# Altium PCB PCB2.PcbDoc (part 2 of 2)
Units mm, origin at the board's own origin, x right, y up, seen from the top; angles counter-clockwise.
Board outline 211.07 x 146.43 mm, 4 copper layers (Top Layer, Mid Layer 1, Mid Layer 2, Bottom Layer), stack 1.57 mm thick; 324 components, 350 nets, 1525 pads, 85 vias.
Unrouted connection lines stored in the file: 956.
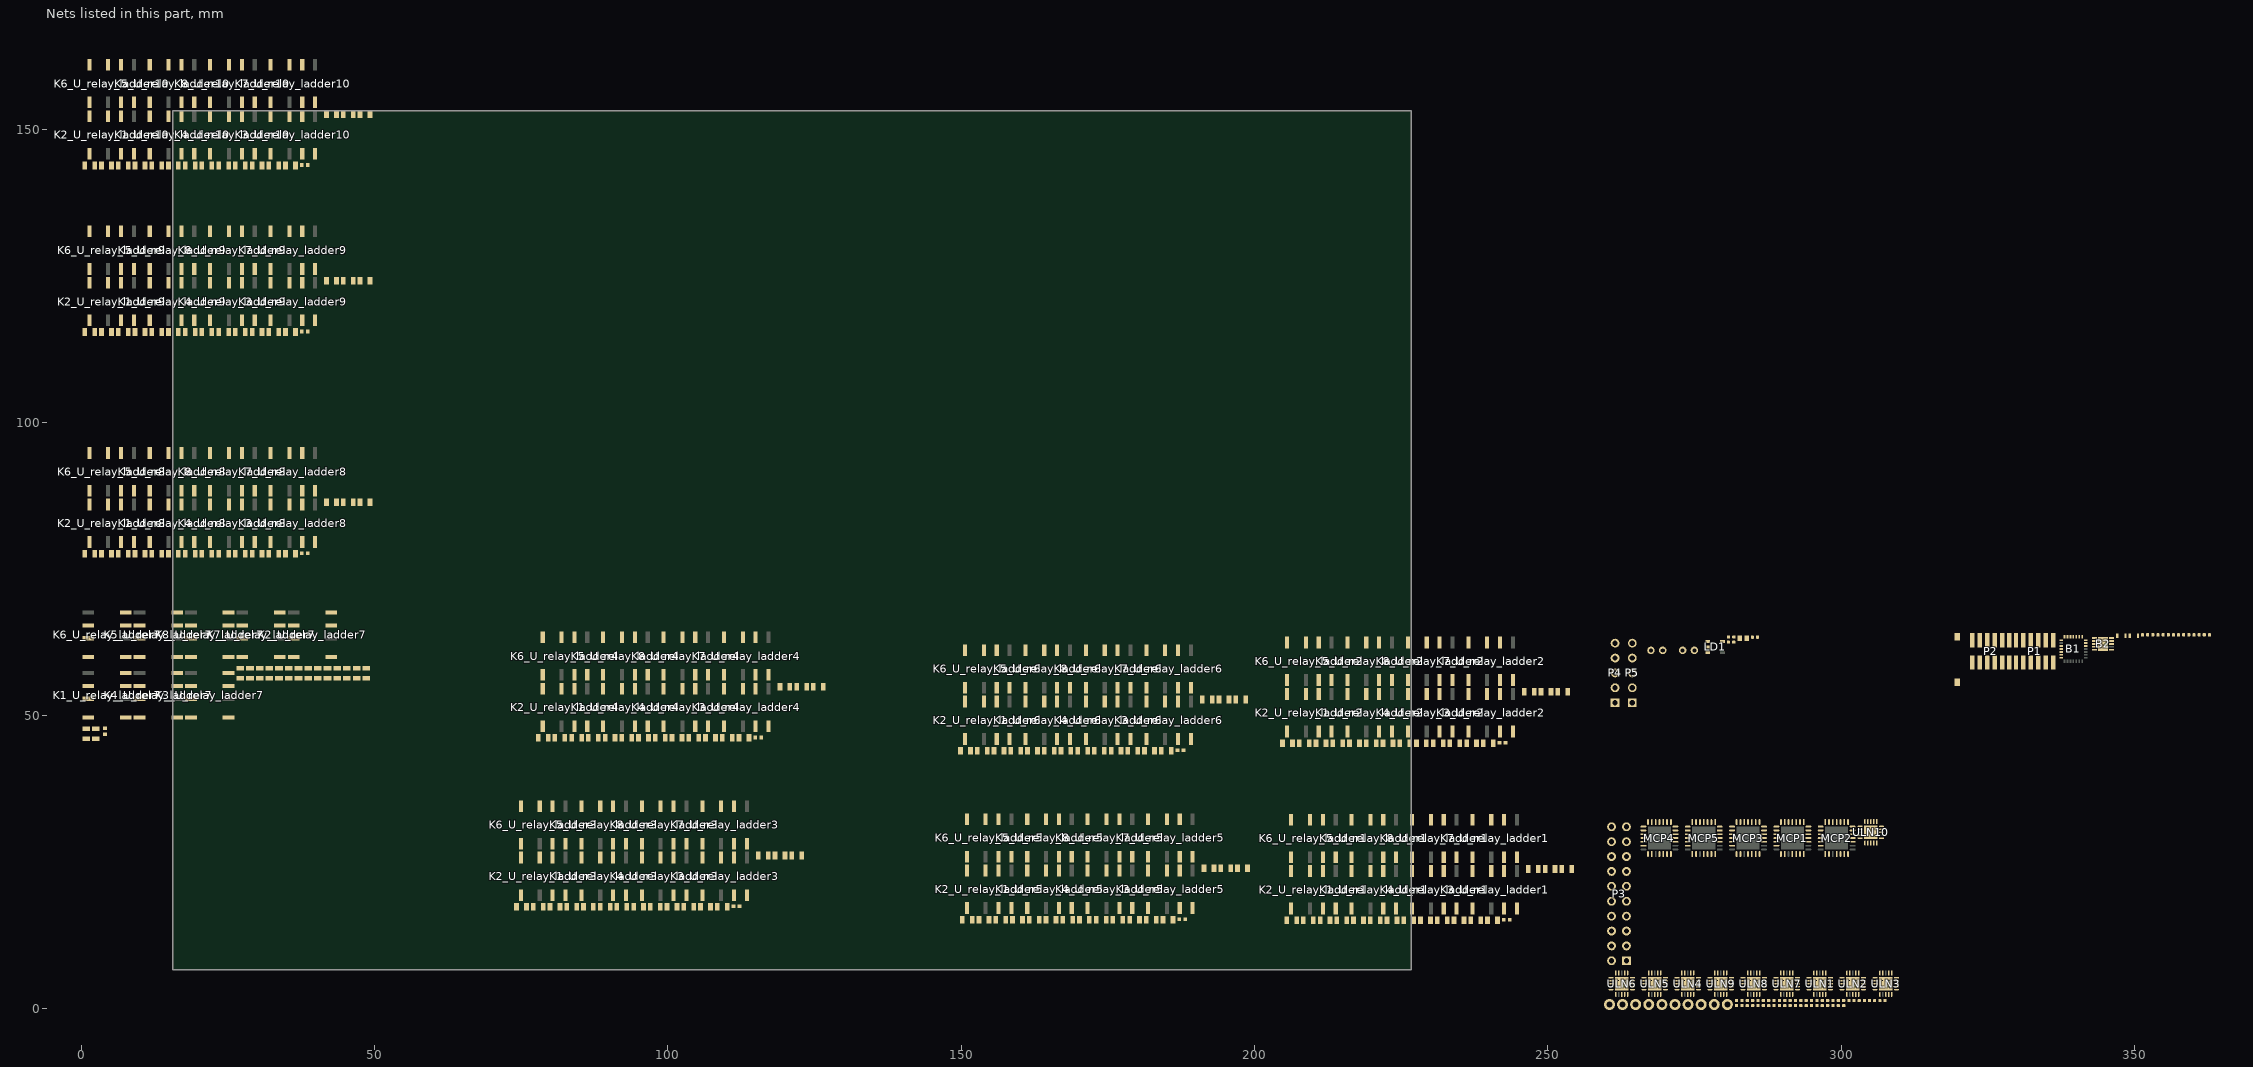
[diagram p2: the nets of this part, all layers, seen from the top]

## Part data
B1: "Mainstream Arm Cortex-M0+ MCU with 32 Kbytes of Flash memory, 12 Kbytes RAM, 48 MHz CPU, 2x USART, timers, ADC, comm. I/F, 2-3.6V", Manufacturer_Name=STMicroelectronics, Mouser Part Number=511-STM32C031G6U6, Datasheet Link=https://www.st.com/resource/en/datasheet/stm32c031c4.pdf, Geometry.Height=0.6mm, Manufacturer_Part_Number=STM32C031G6U6, Mouser Price/Stock=https://www.mouser.co.uk/ProductDetail/STMicroelectronics/STM32C031G6U6?qs=IPgv5n7u5QZqRf3nOTChhw%3D%3D
B2: "RS-422/RS-485 Interface IC Wide Supply Trans with I/O Interface", Manufacturer_Name="MaxLinear, Inc.", Mouser Part Number=701-XR33202EEHBTR-F, Datasheet Link=https://www.maxlinear.com/ds/xr33202.pdf, Geometry.Height=0.8mm, Manufacturer_Part_Number=XR33202EEHBTR-F, Mouser Price/Stock=https://www.mouser.co.uk/ProductDetail/MaxLinear/XR33202EEHBTR-F?qs=GtWAI9k6EVi4nRW8bj1LFw%3D%3D
C1 C2 C3 C4 C5 C6 C7 C8 C9 C10 C11 C12 C13 C14 C15 C16 C17 C18 C19 C22 C23 C24 C25 C26 C27 C28 C29: library part C, "Capacitor"
C20 C21: "Capacitor Polarized"
K1_U_relay_ladder1 K1_U_relay_ladder2 K1_U_relay_ladder3 K1_U_relay_ladder4 K1_U_relay_ladder5 K1_U_relay_ladder6 K1_U_relay_ladder7 K1_U_relay_ladder8 K1_U_relay_ladder9 K1_U_relay_ladder10 K2_U_relay_ladder1 K2_U_relay_ladder2 K2_U_relay_ladder3 K2_U_relay_ladder4 K2_U_relay_ladder5 K2_U_relay_ladder6 K2_U_relay_ladder7 K2_U_relay_ladder8 K2_U_relay_ladder9 K2_U_relay_ladder10 K3_U_relay_ladder1 K3_U_relay_ladder2 K3_U_relay_ladder3 K3_U_relay_ladder4 K3_U_relay_ladder5 K3_U_relay_ladder6 K3_U_relay_ladder7 K3_U_relay_ladder8 K3_U_relay_ladder9 K3_U_relay_ladder10 K4_U_relay_ladder1 K4_U_relay_ladder2 K4_U_relay_ladder3 K4_U_relay_ladder4 K4_U_relay_ladder5 K4_U_relay_ladder6 K4_U_relay_ladder7 K4_U_relay_ladder8 K4_U_relay_ladder9 K4_U_relay_ladder10 K5_U_relay_ladder1 K5_U_relay_ladder2 K5_U_relay_ladder3 K5_U_relay_ladder4 K5_U_relay_ladder5 K5_U_relay_ladder6 K5_U_relay_ladder7 K5_U_relay_ladder8 K5_U_relay_ladder9 K5_U_relay_ladder10 K6_U_relay_ladder1 K6_U_relay_ladder2 K6_U_relay_ladder3 K6_U_relay_ladder4 K6_U_relay_ladder5 K6_U_relay_ladder6 K6_U_relay_ladder7 K6_U_relay_ladder8 K6_U_relay_ladder9 K6_U_relay_ladder10 K7_U_relay_ladder1 K7_U_relay_ladder2 K7_U_relay_ladder3 K7_U_relay_ladder4 K7_U_relay_ladder5 K7_U_relay_ladder6 K7_U_relay_ladder7 K7_U_relay_ladder8 K7_U_relay_ladder9 K7_U_relay_ladder10 K8_U_relay_ladder1 K8_U_relay_ladder2 K8_U_relay_ladder3 K8_U_relay_ladder4 K8_U_relay_ladder5 K8_U_relay_ladder6 K8_U_relay_ladder7 K8_U_relay_ladder8 K8_U_relay_ladder9 K8_U_relay_ladder10: library part "IM-GR Relay DPDT", "TE CONNECTIVITY  IM-GR  RELAY, DPDT, NO", Farnell ID=1175070, URL=http://si.farnell.com/te-connectivity-axicom/im06gr/relay-gull-wing-dpco-12vdc-2a/dp/1175070
P1 P2: library part "Header 6X2", "Header, 6-Pin, Dual row", LatestRevisionDate=17-Jul-2002, LatestRevisionNote="Re-released for DXP Platform.", Publisher="Altium Limited"
P3: "Header, 10-Pin, Dual row", LatestRevisionDate=17-Jul-2002, LatestRevisionNote="Re-released for DXP Platform.", Publisher="Altium Limited"
P4 P5: "Header, 5-Pin", LatestRevisionDate=17-Jul-2002, LatestRevisionNote="Re-released for DXP Platform.", Publisher="Altium Limited"
R1 R2 R3 R4 R5_U_relay_ladder1 R5_U_relay_ladder2 R5_U_relay_ladder3 R5_U_relay_ladder4 R5_U_relay_ladder5 R5_U_relay_ladder6 R5_U_relay_ladder7 R5_U_relay_ladder8 R5_U_relay_ladder9 R5_U_relay_ladder10 R6_U_relay_ladder1 R6_U_relay_ladder2 R6_U_relay_ladder3 R6_U_relay_ladder4 R6_U_relay_ladder5 R6_U_relay_ladder6 R6_U_relay_ladder7 R6_U_relay_ladder8 R6_U_relay_ladder9 R6_U_relay_ladder10 R7_U_relay_ladder1 R7_U_relay_ladder2 R7_U_relay_ladder3 R7_U_relay_ladder4 R7_U_relay_ladder5 R7_U_relay_ladder6 R7_U_relay_ladder7 R7_U_relay_ladder8 R7_U_relay_ladder9 R7_U_relay_ladder10 R8_U_relay_ladder1 R8_U_relay_ladder2 R8_U_relay_ladder3 R8_U_relay_ladder4 R8_U_relay_ladder5 R8_U_relay_ladder6 R8_U_relay_ladder7 R8_U_relay_ladder8 R8_U_relay_ladder9 R8_U_relay_ladder10 R9_U_relay_ladder1 R9_U_relay_ladder2 R9_U_relay_ladder3 R9_U_relay_ladder4 R9_U_relay_ladder5 R9_U_relay_ladder6 R9_U_relay_ladder7 R9_U_relay_ladder8 R9_U_relay_ladder9 R9_U_relay_ladder10 R10_U_relay_ladder1 R10_U_relay_ladder2 R10_U_relay_ladder3 R10_U_relay_ladder4 R10_U_relay_ladder5 R10_U_relay_ladder6 R10_U_relay_ladder7 R10_U_relay_ladder8 R10_U_relay_ladder9 R10_U_relay_ladder10 R11_U_relay_ladder1 R11_U_relay_ladder2 R11_U_relay_ladder3 R11_U_relay_ladder4 R11_U_relay_ladder5 R11_U_relay_ladder6 R11_U_relay_ladder7 R11_U_relay_ladder8 R11_U_relay_ladder9 R11_U_relay_ladder10 R12_U_relay_ladder1 R12_U_relay_ladder2 R12_U_relay_ladder3 R12_U_relay_ladder4 R12_U_relay_ladder5 R12_U_relay_ladder6 R12_U_relay_ladder7 R12_U_relay_ladder8 R12_U_relay_ladder9 R12_U_relay_ladder10 R13_U_relay_ladder1 R13_U_relay_ladder2 R13_U_relay_ladder3 R13_U_relay_ladder4 R13_U_relay_ladder5 R13_U_relay_ladder6 R13_U_relay_ladder7 R13_U_relay_ladder8 R13_U_relay_ladder9 R13_U_relay_ladder10 R14_U_relay_ladder1 R14_U_relay_ladder2 R14_U_relay_ladder3 R14_U_relay_ladder4 R14_U_relay_ladder5 R14_U_relay_ladder6 R14_U_relay_ladder7 R14_U_relay_ladder8 R14_U_relay_ladder9 R14_U_relay_ladder10 R15_U_relay_ladder1 R15_U_relay_ladder2 R15_U_relay_ladder3 R15_U_relay_ladder4 R15_U_relay_ladder5 R15_U_relay_ladder6 R15_U_relay_ladder7 R15_U_relay_ladder8 R15_U_relay_ladder9 R15_U_relay_ladder10 R16_U_relay_ladder1 R16_U_relay_ladder2 R16_U_relay_ladder3 R16_U_relay_ladder4 R16_U_relay_ladder5 R16_U_relay_ladder6 R16_U_relay_ladder7 R16_U_relay_ladder8 R16_U_relay_ladder9 R16_U_relay_ladder10 R17_U_relay_ladder1 R17_U_relay_ladder2 R17_U_relay_ladder3 R17_U_relay_ladder4 R17_U_relay_ladder5 R17_U_relay_ladder6 R17_U_relay_ladder7 R17_U_relay_ladder8 R17_U_relay_ladder9 R17_U_relay_ladder10 R18_U_relay_ladder1 R18_U_relay_ladder2 R18_U_relay_ladder3 R18_U_relay_ladder4 R18_U_relay_ladder5 R18_U_relay_ladder6 R18_U_relay_ladder7 R18_U_relay_ladder8 R18_U_relay_ladder9 R18_U_relay_ladder10 R19_U_relay_ladder1 R19_U_relay_ladder2 R19_U_relay_ladder3 R19_U_relay_ladder4 R19_U_relay_ladder5 R19_U_relay_ladder6 R19_U_relay_ladder7 R19_U_relay_ladder8 R19_U_relay_ladder9 R19_U_relay_ladder10 R20_U_relay_ladder1 R20_U_relay_ladder2 R20_U_relay_ladder3 R20_U_relay_ladder4 R20_U_relay_ladder5 R20_U_relay_ladder6 R20_U_relay_ladder7 R20_U_relay_ladder8 R20_U_relay_ladder9 R20_U_relay_ladder10 R21 R22 R23 R24 R25: library part R, "R"
X1: "Tactile Switches Tact 50mA 12VDC, 6.0x3.5, 2.5mm H, 180gf, G leads, No ground pin, White Actuator", Manufacturer_Name="C & K COMPONENTS", Manufacturer_Part_Number="PTS636 SM25 SMTR LFS", Mouser Part Number=611-PTS636SM25SMTRLF, Datasheet Link="https://componentsearchengine.com/Datasheets/1/PTS636 SM25 SMTR LFS.pdf", Geometry.Height=2.7mm, Mouser Price/Stock=https://www.mouser.co.uk/ProductDetail/CK/PTS636-SM25-SMTR-LFS?qs=vLWxofP3U2yIXR4iooxesw%3D%3D

## Via types
v1: diameter 0.5, hole 0.2, Top Layer to Bottom Layer, 85 vias

## Nets (pads, with @x,y where several pads share a name; then routed paths per layer and width w, separated by ;. In a path a pad name is that pad's centre, name@x,y a point inside that pad or via, vN(x,y) a via of type N, cw(c..) or ccw(c..) an arc to the next point about the centre after c; other vN are vias at no path point)
+3V3: B1.3 B2.1 C1.1 C3.1 C7.2 C10.1 C11.1 C12.2 C13.2 C24.2 C25.2 LD1.5 MCP1.5 MCP2.5 MCP3.5 MCP4.5 MCP5.5 R1.1 R2.1 R4.1 R21.1 R22.1 R23.1 R24.1 R25.1
+12: C14.1 C15.1 C16.1 C17.1 C18.1 C19.1 C20.1 C26.1 C27.1 C28.1 C29.1 K1_U_relay_ladder1.1 K1_U_relay_ladder2.1 K1_U_relay_ladder3.1 K1_U_relay_ladder4.1 K1_U_relay_ladder5.1 K1_U_relay_ladder6.1 K1_U_relay_ladder7.1 K1_U_relay_ladder8.1 K1_U_relay_ladder9.1 K1_U_relay_ladder10.1 K2_U_relay_ladder1.1 K2_U_relay_ladder2.1 K2_U_relay_ladder3.1 K2_U_relay_ladder4.1 K2_U_relay_ladder5.1 K2_U_relay_ladder6.1 K2_U_relay_ladder7.1 K2_U_relay_ladder8.1 K2_U_relay_ladder9.1 K2_U_relay_ladder10.1 K3_U_relay_ladder1.1 K3_U_relay_ladder2.1 K3_U_relay_ladder3.1 K3_U_relay_ladder4.1 K3_U_relay_ladder5.1 K3_U_relay_ladder6.1 K3_U_relay_ladder7.1 K3_U_relay_ladder8.1 K3_U_relay_ladder9.1 K3_U_relay_ladder10.1 K4_U_relay_ladder1.1 K4_U_relay_ladder2.1 K4_U_relay_ladder3.1 K4_U_relay_ladder4.1 K4_U_relay_ladder5.1 K4_U_relay_ladder6.1 K4_U_relay_ladder7.1 K4_U_relay_ladder8.1 K4_U_relay_ladder9.1 K4_U_relay_ladder10.1 K5_U_relay_ladder1.1 K5_U_relay_ladder2.1 K5_U_relay_ladder3.1 K5_U_relay_ladder4.1 K5_U_relay_ladder5.1 K5_U_relay_ladder6.1 K5_U_relay_ladder7.1 K5_U_relay_ladder8.1 K5_U_relay_ladder9.1 K5_U_relay_ladder10.1 K6_U_relay_ladder1.1 K6_U_relay_ladder2.1 K6_U_relay_ladder3.1 K6_U_relay_ladder4.1 K6_U_relay_ladder5.1 K6_U_relay_ladder6.1 K6_U_relay_ladder7.1 K6_U_relay_ladder8.1 K6_U_relay_ladder9.1 K6_U_relay_ladder10.1 K7_U_relay_ladder1.1 K7_U_relay_ladder2.1 K7_U_relay_ladder3.1 K7_U_relay_ladder4.1 K7_U_relay_ladder5.1 K7_U_relay_ladder6.1 K7_U_relay_ladder7.1 K7_U_relay_ladder8.1 K7_U_relay_ladder9.1 K7_U_relay_ladder10.1 K8_U_relay_ladder1.1 K8_U_relay_ladder2.1 K8_U_relay_ladder3.1 K8_U_relay_ladder4.1 K8_U_relay_ladder5.1 K8_U_relay_ladder6.1 K8_U_relay_ladder7.1 K8_U_relay_ladder8.1 K8_U_relay_ladder9.1 K8_U_relay_ladder10.1 P4.2 P4.4 P5.2 P5.4 ULN1.9 ULN2.9 ULN3.9 ULN4.9 ULN5.9 ULN6.9 ULN7.9 ULN8.9 ULN9.9 ULN10.9
A1: K1_U_relay_ladder10.6 P3.3 R13_U_relay_ladder10.1
A2: K1_U_relay_ladder9.6 P3.7 R13_U_relay_ladder9.1
A3: K1_U_relay_ladder8.6 P3.11 R13_U_relay_ladder8.1
A4: K1_U_relay_ladder7.6 P3.15 R13_U_relay_ladder7.1
A5: K1_U_relay_ladder2.6 K1_U_relay_ladder6.6 P3.19 R13_U_relay_ladder2.1 R13_U_relay_ladder6.1
A6: K1_U_relay_ladder1.6 K1_U_relay_ladder3.6 K1_U_relay_ladder5.6 R13_U_relay_ladder1.1 R13_U_relay_ladder3.1 R13_U_relay_ladder5.1
A7: K1_U_relay_ladder4.6 R13_U_relay_ladder4.1
A_N: B2.8 P1.6 P2.6 R3.2
AGND: P3.4 P3.8 P3.12 P3.16 P3.20
B1: J3_U_relay_ladder10.1 J3_U_relay_ladder10.2 K8_U_relay_ladder10.3 K8_U_relay_ladder10.7 P3.2 R12_U_relay_ladder10.2 R20_U_relay_ladder10.2 TP1.1
B2: J3_U_relay_ladder9.1 J3_U_relay_ladder9.2 K8_U_relay_ladder9.3 K8_U_relay_ladder9.7 P3.6 R12_U_relay_ladder9.2 R20_U_relay_ladder9.2 TP2.1
B3: J3_U_relay_ladder8.1 J3_U_relay_ladder8.2 K8_U_relay_ladder8.3 K8_U_relay_ladder8.7 P3.10 R12_U_relay_ladder8.2 R20_U_relay_ladder8.2 TP3.1
B4: J3_U_relay_ladder7.1 J3_U_relay_ladder7.2 K8_U_relay_ladder7.3 K8_U_relay_ladder7.7 P3.14 R12_U_relay_ladder7.2 R20_U_relay_ladder7.2 TP4.1
B5: J3_U_relay_ladder2.1 J3_U_relay_ladder2.2 J3_U_relay_ladder6.1 J3_U_relay_ladder6.2 K8_U_relay_ladder2.3 K8_U_relay_ladder2.7 K8_U_relay_ladder6.3 K8_U_relay_ladder6.7 P3.18 R12_U_relay_ladder2.2 R12_U_relay_ladder6.2 R20_U_relay_ladder2.2 R20_U_relay_ladder6.2 TP5.1 TP9.1
B6: J3_U_relay_ladder1.1 J3_U_relay_ladder1.2 J3_U_relay_ladder3.1 J3_U_relay_ladder3.2 J3_U_relay_ladder5.1 J3_U_relay_ladder5.2 K8_U_relay_ladder1.3 K8_U_relay_ladder1.7 K8_U_relay_ladder3.3 K8_U_relay_ladder3.7 K8_U_relay_ladder5.3 K8_U_relay_ladder5.7 R12_U_relay_ladder1.2 R12_U_relay_ladder3.2 R12_U_relay_ladder5.2 R20_U_relay_ladder1.2 R20_U_relay_ladder3.2 R20_U_relay_ladder5.2 TP6.1 TP8.1 TP10.1
B7: J3_U_relay_ladder4.1 J3_U_relay_ladder4.2 K8_U_relay_ladder4.3 K8_U_relay_ladder4.7 R12_U_relay_ladder4.2 R20_U_relay_ladder4.2 TP7.1
B_P: B2.9 J2.1 P1.7 P2.7
BTN: B1.7 X1.2
C1: K1_U_relay_ladder10.4 P3.1 R5_U_relay_ladder10.1
C2: K1_U_relay_ladder9.4 P3.5 R5_U_relay_ladder9.1
C3: K1_U_relay_ladder8.4 P3.9 R5_U_relay_ladder8.1
C4: K1_U_relay_ladder7.4 P3.13 R5_U_relay_ladder7.1
C5: K1_U_relay_ladder2.4 K1_U_relay_ladder6.4 P3.17 R5_U_relay_ladder2.1 R5_U_relay_ladder6.1
C6: K1_U_relay_ladder1.4 K1_U_relay_ladder3.4 K1_U_relay_ladder5.4 R5_U_relay_ladder1.1 R5_U_relay_ladder3.1 R5_U_relay_ladder5.1
C7: K1_U_relay_ladder4.4 R5_U_relay_ladder4.1
GND: B1.4 B2.6 B2.11 C1.2 C2.2 C3.2 C4.1 C5.1 C6.1 C7.1 C8.2 C9.2 C10.2 C11.2 C12.1 C13.1 C20.2 C21.2 C22.1 C23.1 C24.1 C25.1 LD1.2 MCP1.6 MCP1.11 MCP1.12 MCP1.13 MCP2.6 MCP2.11 MCP2.12 MCP2.13 MCP3.6 MCP3.11 MCP3.12 MCP3.13 MCP4.6 MCP4.11 MCP4.12 MCP4.13 MCP5.6 MCP5.11 MCP5.12 MCP5.13 P1.5 P1.8 P2.5 P2.8 P4.1 P4.5 P5.1 P5.5 X1.1
INT: B1.6 P1.10 P2.10
MISO: J1.1 P1.1 P2.1
MISO_MCU: B1.24 J1.2 P2.2
MOSI_MCU: B1.25 P1.2
NetC4_2: C4.2 MCP1.14 R21.2
NetC5_2: C5.2 MCP2.14 R22.2
NetC6_2: C6.2 MCP3.14 R23.2
NetC22_2: C22.2 MCP4.14 R24.2
NetC23_2: C23.2 MCP5.14 R25.2
NetJ2_2: J2.2 R3.1
NetK1_U_relay_ladder1_3: K1_U_relay_ladder1.3 K2_U_relay_ladder1.4 R5_U_relay_ladder1.2 R6_U_relay_ladder1.1
NetK1_U_relay_ladder1_7: K1_U_relay_ladder1.7 K2_U_relay_ladder1.6 R13_U_relay_ladder1.2 R14_U_relay_ladder1.1
NetK1_U_relay_ladder1_8: K1_U_relay_ladder1.8 ULN10.10
NetK1_U_relay_ladder2_3: K1_U_relay_ladder2.3 K2_U_relay_ladder2.4 R5_U_relay_ladder2.2 R6_U_relay_ladder2.1
NetK1_U_relay_ladder2_7: K1_U_relay_ladder2.7 K2_U_relay_ladder2.6 R13_U_relay_ladder2.2 R14_U_relay_ladder2.1
NetK1_U_relay_ladder2_8: K1_U_relay_ladder2.8 ULN9.10
NetK1_U_relay_ladder3_3: K1_U_relay_ladder3.3 K2_U_relay_ladder3.4 R5_U_relay_ladder3.2 R6_U_relay_ladder3.1
NetK1_U_relay_ladder3_7: K1_U_relay_ladder3.7 K2_U_relay_ladder3.6 R13_U_relay_ladder3.2 R14_U_relay_ladder3.1
NetK1_U_relay_ladder3_8: K1_U_relay_ladder3.8 ULN8.10
NetK1_U_relay_ladder4_3: K1_U_relay_ladder4.3 K2_U_relay_ladder4.4 R5_U_relay_ladder4.2 R6_U_relay_ladder4.1
NetK1_U_relay_ladder4_7: K1_U_relay_ladder4.7 K2_U_relay_ladder4.6 R13_U_relay_ladder4.2 R14_U_relay_ladder4.1
NetK1_U_relay_ladder4_8: K1_U_relay_ladder4.8 ULN7.10
NetK1_U_relay_ladder5_3: K1_U_relay_ladder5.3 K2_U_relay_ladder5.4 R5_U_relay_ladder5.2 R6_U_relay_ladder5.1
NetK1_U_relay_ladder5_7: K1_U_relay_ladder5.7 K2_U_relay_ladder5.6 R13_U_relay_ladder5.2 R14_U_relay_ladder5.1
NetK1_U_relay_ladder5_8: K1_U_relay_ladder5.8 ULN6.10
NetK1_U_relay_ladder6_3: K1_U_relay_ladder6.3 K2_U_relay_ladder6.4 R5_U_relay_ladder6.2 R6_U_relay_ladder6.1
NetK1_U_relay_ladder6_7: K1_U_relay_ladder6.7 K2_U_relay_ladder6.6 R13_U_relay_ladder6.2 R14_U_relay_ladder6.1
NetK1_U_relay_ladder6_8: K1_U_relay_ladder6.8 ULN5.10
NetK1_U_relay_ladder7_3: K1_U_relay_ladder7.3 K2_U_relay_ladder7.4 R5_U_relay_ladder7.2 R6_U_relay_ladder7.1
NetK1_U_relay_ladder7_7: K1_U_relay_ladder7.7 K2_U_relay_ladder7.6 R13_U_relay_ladder7.2 R14_U_relay_ladder7.1
NetK1_U_relay_ladder7_8: K1_U_relay_ladder7.8 ULN4.10
NetK1_U_relay_ladder8_3: K1_U_relay_ladder8.3 K2_U_relay_ladder8.4 R5_U_relay_ladder8.2 R6_U_relay_ladder8.1
NetK1_U_relay_ladder8_7: K1_U_relay_ladder8.7 K2_U_relay_ladder8.6 R13_U_relay_ladder8.2 R14_U_relay_ladder8.1
NetK1_U_relay_ladder8_8: K1_U_relay_ladder8.8 ULN3.10
NetK1_U_relay_ladder9_3: K1_U_relay_ladder9.3 K2_U_relay_ladder9.4 R5_U_relay_ladder9.2 R6_U_relay_ladder9.1
NetK1_U_relay_ladder9_7: K1_U_relay_ladder9.7 K2_U_relay_ladder9.6 R13_U_relay_ladder9.2 R14_U_relay_ladder9.1
NetK1_U_relay_ladder9_8: K1_U_relay_ladder9.8 ULN2.10
NetK1_U_relay_ladder10_3: K1_U_relay_ladder10.3 K2_U_relay_ladder10.4 R5_U_relay_ladder10.2 R6_U_relay_ladder10.1
NetK1_U_relay_ladder10_7: K1_U_relay_ladder10.7 K2_U_relay_ladder10.6 R13_U_relay_ladder10.2 R14_U_relay_ladder10.1
NetK1_U_relay_ladder10_8: K1_U_relay_ladder10.8 ULN1.10
NetK2_U_relay_ladder1_3: K2_U_relay_ladder1.3 K3_U_relay_ladder1.4 R6_U_relay_ladder1.2 R7_U_relay_ladder1.1
NetK2_U_relay_ladder1_7: K2_U_relay_ladder1.7 K3_U_relay_ladder1.6 R14_U_relay_ladder1.2 R15_U_relay_ladder1.1
NetK2_U_relay_ladder1_8: K2_U_relay_ladder1.8 ULN10.11
NetK2_U_relay_ladder2_3: K2_U_relay_ladder2.3 K3_U_relay_ladder2.4 R6_U_relay_ladder2.2 R7_U_relay_ladder2.1
NetK2_U_relay_ladder2_7: K2_U_relay_ladder2.7 K3_U_relay_ladder2.6 R14_U_relay_ladder2.2 R15_U_relay_ladder2.1
NetK2_U_relay_ladder2_8: K2_U_relay_ladder2.8 ULN9.11
NetK2_U_relay_ladder3_3: K2_U_relay_ladder3.3 K3_U_relay_ladder3.4 R6_U_relay_ladder3.2 R7_U_relay_ladder3.1
NetK2_U_relay_ladder3_7: K2_U_relay_ladder3.7 K3_U_relay_ladder3.6 R14_U_relay_ladder3.2 R15_U_relay_ladder3.1
NetK2_U_relay_ladder3_8: K2_U_relay_ladder3.8 ULN8.11
NetK2_U_relay_ladder4_3: K2_U_relay_ladder4.3 K3_U_relay_ladder4.4 R6_U_relay_ladder4.2 R7_U_relay_ladder4.1
NetK2_U_relay_ladder4_7: K2_U_relay_ladder4.7 K3_U_relay_ladder4.6 R14_U_relay_ladder4.2 R15_U_relay_ladder4.1
NetK2_U_relay_ladder4_8: K2_U_relay_ladder4.8 ULN7.11
NetK2_U_relay_ladder5_3: K2_U_relay_ladder5.3 K3_U_relay_ladder5.4 R6_U_relay_ladder5.2 R7_U_relay_ladder5.1
NetK2_U_relay_ladder5_7: K2_U_relay_ladder5.7 K3_U_relay_ladder5.6 R14_U_relay_ladder5.2 R15_U_relay_ladder5.1
NetK2_U_relay_ladder5_8: K2_U_relay_ladder5.8 ULN6.11
NetK2_U_relay_ladder6_3: K2_U_relay_ladder6.3 K3_U_relay_ladder6.4 R6_U_relay_ladder6.2 R7_U_relay_ladder6.1
NetK2_U_relay_ladder6_7: K2_U_relay_ladder6.7 K3_U_relay_ladder6.6 R14_U_relay_ladder6.2 R15_U_relay_ladder6.1
NetK2_U_relay_ladder6_8: K2_U_relay_ladder6.8 ULN5.11
NetK2_U_relay_ladder7_3: K2_U_relay_ladder7.3 K3_U_relay_ladder7.4 R6_U_relay_ladder7.2 R7_U_relay_ladder7.1
NetK2_U_relay_ladder7_7: K2_U_relay_ladder7.7 K3_U_relay_ladder7.6 R14_U_relay_ladder7.2 R15_U_relay_ladder7.1
NetK2_U_relay_ladder7_8: K2_U_relay_ladder7.8 ULN4.11
NetK2_U_relay_ladder8_3: K2_U_relay_ladder8.3 K3_U_relay_ladder8.4 R6_U_relay_ladder8.2 R7_U_relay_ladder8.1
NetK2_U_relay_ladder8_7: K2_U_relay_ladder8.7 K3_U_relay_ladder8.6 R14_U_relay_ladder8.2 R15_U_relay_ladder8.1
NetK2_U_relay_ladder8_8: K2_U_relay_ladder8.8 ULN3.11
NetK2_U_relay_ladder9_3: K2_U_relay_ladder9.3 K3_U_relay_ladder9.4 R6_U_relay_ladder9.2 R7_U_relay_ladder9.1
NetK2_U_relay_ladder9_7: K2_U_relay_ladder9.7 K3_U_relay_ladder9.6 R14_U_relay_ladder9.2 R15_U_relay_ladder9.1
NetK2_U_relay_ladder9_8: K2_U_relay_ladder9.8 ULN2.11
NetK2_U_relay_ladder10_3: K2_U_relay_ladder10.3 K3_U_relay_ladder10.4 R6_U_relay_ladder10.2 R7_U_relay_ladder10.1
NetK2_U_relay_ladder10_7: K2_U_relay_ladder10.7 K3_U_relay_ladder10.6 R14_U_relay_ladder10.2 R15_U_relay_ladder10.1
NetK2_U_relay_ladder10_8: K2_U_relay_ladder10.8 ULN1.11
NetK3_U_relay_ladder1_3: K3_U_relay_ladder1.3 K4_U_relay_ladder1.4 R7_U_relay_ladder1.2 R8_U_relay_ladder1.1
NetK3_U_relay_ladder1_7: K3_U_relay_ladder1.7 K4_U_relay_ladder1.6 R15_U_relay_ladder1.2 R16_U_relay_ladder1.1
NetK3_U_relay_ladder1_8: K3_U_relay_ladder1.8 ULN10.12
NetK3_U_relay_ladder2_3: K3_U_relay_ladder2.3 K4_U_relay_ladder2.4 R7_U_relay_ladder2.2 R8_U_relay_ladder2.1
NetK3_U_relay_ladder2_7: K3_U_relay_ladder2.7 K4_U_relay_ladder2.6 R15_U_relay_ladder2.2 R16_U_relay_ladder2.1
NetK3_U_relay_ladder2_8: K3_U_relay_ladder2.8 ULN9.12
NetK3_U_relay_ladder3_3: K3_U_relay_ladder3.3 K4_U_relay_ladder3.4 R7_U_relay_ladder3.2 R8_U_relay_ladder3.1
NetK3_U_relay_ladder3_7: K3_U_relay_ladder3.7 K4_U_relay_ladder3.6 R15_U_relay_ladder3.2 R16_U_relay_ladder3.1
NetK3_U_relay_ladder3_8: K3_U_relay_ladder3.8 ULN8.12
NetK3_U_relay_ladder4_3: K3_U_relay_ladder4.3 K4_U_relay_ladder4.4 R7_U_relay_ladder4.2 R8_U_relay_ladder4.1
NetK3_U_relay_ladder4_7: K3_U_relay_ladder4.7 K4_U_relay_ladder4.6 R15_U_relay_ladder4.2 R16_U_relay_ladder4.1
NetK3_U_relay_ladder4_8: K3_U_relay_ladder4.8 ULN7.12
NetK3_U_relay_ladder5_3: K3_U_relay_ladder5.3 K4_U_relay_ladder5.4 R7_U_relay_ladder5.2 R8_U_relay_ladder5.1
NetK3_U_relay_ladder5_7: K3_U_relay_ladder5.7 K4_U_relay_ladder5.6 R15_U_relay_ladder5.2 R16_U_relay_ladder5.1
NetK3_U_relay_ladder5_8: K3_U_relay_ladder5.8 ULN6.12
NetK3_U_relay_ladder6_3: K3_U_relay_ladder6.3 K4_U_relay_ladder6.4 R7_U_relay_ladder6.2 R8_U_relay_ladder6.1
NetK3_U_relay_ladder6_7: K3_U_relay_ladder6.7 K4_U_relay_ladder6.6 R15_U_relay_ladder6.2 R16_U_relay_ladder6.1
NetK3_U_relay_ladder6_8: K3_U_relay_ladder6.8 ULN5.12
NetK3_U_relay_ladder7_3: K3_U_relay_ladder7.3 K4_U_relay_ladder7.4 R7_U_relay_ladder7.2 R8_U_relay_ladder7.1
NetK3_U_relay_ladder7_7: K3_U_relay_ladder7.7 K4_U_relay_ladder7.6 R15_U_relay_ladder7.2 R16_U_relay_ladder7.1
NetK3_U_relay_ladder7_8: K3_U_relay_ladder7.8 ULN4.12
NetK3_U_relay_ladder8_3: K3_U_relay_ladder8.3 K4_U_relay_ladder8.4 R7_U_relay_ladder8.2 R8_U_relay_ladder8.1
NetK3_U_relay_ladder8_7: K3_U_relay_ladder8.7 K4_U_relay_ladder8.6 R15_U_relay_ladder8.2 R16_U_relay_ladder8.1
NetK3_U_relay_ladder8_8: K3_U_relay_ladder8.8 ULN3.12
NetK3_U_relay_ladder9_3: K3_U_relay_ladder9.3 K4_U_relay_ladder9.4 R7_U_relay_ladder9.2 R8_U_relay_ladder9.1
NetK3_U_relay_ladder9_7: K3_U_relay_ladder9.7 K4_U_relay_ladder9.6 R15_U_relay_ladder9.2 R16_U_relay_ladder9.1
NetK3_U_relay_ladder9_8: K3_U_relay_ladder9.8 ULN2.12
NetK3_U_relay_ladder10_3: K3_U_relay_ladder10.3 K4_U_relay_ladder10.4 R7_U_relay_ladder10.2 R8_U_relay_ladder10.1
NetK3_U_relay_ladder10_7: K3_U_relay_ladder10.7 K4_U_relay_ladder10.6 R15_U_relay_ladder10.2 R16_U_relay_ladder10.1
NetK3_U_relay_ladder10_8: K3_U_relay_ladder10.8 ULN1.12
NetK4_U_relay_ladder1_3: K4_U_relay_ladder1.3 K5_U_relay_ladder1.4 R8_U_relay_ladder1.2 R9_U_relay_ladder1.1
NetK4_U_relay_ladder1_7: K4_U_relay_ladder1.7 K5_U_relay_ladder1.6 R16_U_relay_ladder1.2 R17_U_relay_ladder1.1
NetK4_U_relay_ladder1_8: K4_U_relay_ladder1.8 ULN10.13
NetK4_U_relay_ladder2_3: K4_U_relay_ladder2.3 K5_U_relay_ladder2.4 R8_U_relay_ladder2.2 R9_U_relay_ladder2.1
NetK4_U_relay_ladder2_7: K4_U_relay_ladder2.7 K5_U_relay_ladder2.6 R16_U_relay_ladder2.2 R17_U_relay_ladder2.1
NetK4_U_relay_ladder2_8: K4_U_relay_ladder2.8 ULN9.13
NetK4_U_relay_ladder3_3: K4_U_relay_ladder3.3 K5_U_relay_ladder3.4 R8_U_relay_ladder3.2 R9_U_relay_ladder3.1
NetK4_U_relay_ladder3_7: K4_U_relay_ladder3.7 K5_U_relay_ladder3.6 R16_U_relay_ladder3.2 R17_U_relay_ladder3.1
NetK4_U_relay_ladder3_8: K4_U_relay_ladder3.8 ULN8.13
NetK4_U_relay_ladder4_3: K4_U_relay_ladder4.3 K5_U_relay_ladder4.4 R8_U_relay_ladder4.2 R9_U_relay_ladder4.1
NetK4_U_relay_ladder4_7: K4_U_relay_ladder4.7 K5_U_relay_ladder4.6 R16_U_relay_ladder4.2 R17_U_relay_ladder4.1
NetK4_U_relay_ladder4_8: K4_U_relay_ladder4.8 ULN7.13
NetK4_U_relay_ladder5_3: K4_U_relay_ladder5.3 K5_U_relay_ladder5.4 R8_U_relay_ladder5.2 R9_U_relay_ladder5.1
NetK4_U_relay_ladder5_7: K4_U_relay_ladder5.7 K5_U_relay_ladder5.6 R16_U_relay_ladder5.2 R17_U_relay_ladder5.1
NetK4_U_relay_ladder5_8: K4_U_relay_ladder5.8 ULN6.13
NetK4_U_relay_ladder6_3: K4_U_relay_ladder6.3 K5_U_relay_ladder6.4 R8_U_relay_ladder6.2 R9_U_relay_ladder6.1
NetK4_U_relay_ladder6_7: K4_U_relay_ladder6.7 K5_U_relay_ladder6.6 R16_U_relay_ladder6.2 R17_U_relay_ladder6.1
NetK4_U_relay_ladder6_8: K4_U_relay_ladder6.8 ULN5.13
NetK4_U_relay_ladder7_3: K4_U_relay_ladder7.3 K5_U_relay_ladder7.4 R8_U_relay_ladder7.2 R9_U_relay_ladder7.1
NetK4_U_relay_ladder7_7: K4_U_relay_ladder7.7 K5_U_relay_ladder7.6 R16_U_relay_ladder7.2 R17_U_relay_ladder7.1
NetK4_U_relay_ladder7_8: K4_U_relay_ladder7.8 ULN4.13
NetK4_U_relay_ladder8_3: K4_U_relay_ladder8.3 K5_U_relay_ladder8.4 R8_U_relay_ladder8.2 R9_U_relay_ladder8.1
NetK4_U_relay_ladder8_7: K4_U_relay_ladder8.7 K5_U_relay_ladder8.6 R16_U_relay_ladder8.2 R17_U_relay_ladder8.1
NetK4_U_relay_ladder8_8: K4_U_relay_ladder8.8 ULN3.13
NetK4_U_relay_ladder9_3: K4_U_relay_ladder9.3 K5_U_relay_ladder9.4 R8_U_relay_ladder9.2 R9_U_relay_ladder9.1
NetK4_U_relay_ladder9_7: K4_U_relay_ladder9.7 K5_U_relay_ladder9.6 R16_U_relay_ladder9.2 R17_U_relay_ladder9.1
NetK4_U_relay_ladder9_8: K4_U_relay_ladder9.8 ULN2.13
NetK4_U_relay_ladder10_3: K4_U_relay_ladder10.3 K5_U_relay_ladder10.4 R8_U_relay_ladder10.2 R9_U_relay_ladder10.1
NetK4_U_relay_ladder10_7: K4_U_relay_ladder10.7 K5_U_relay_ladder10.6 R16_U_relay_ladder10.2 R17_U_relay_ladder10.1
NetK4_U_relay_ladder10_8: K4_U_relay_ladder10.8 ULN1.13
NetK5_U_relay_ladder1_3: K5_U_relay_ladder1.3 K6_U_relay_ladder1.4 R9_U_relay_ladder1.2 R10_U_relay_ladder1.1
NetK5_U_relay_ladder1_7: K5_U_relay_ladder1.7 K6_U_relay_ladder1.6 R17_U_relay_ladder1.2 R18_U_relay_ladder1.1
NetK5_U_relay_ladder1_8: K5_U_relay_ladder1.8 ULN10.14
NetK5_U_relay_ladder2_3: K5_U_relay_ladder2.3 K6_U_relay_ladder2.4 R9_U_relay_ladder2.2 R10_U_relay_ladder2.1
NetK5_U_relay_ladder2_7: K5_U_relay_ladder2.7 K6_U_relay_ladder2.6 R17_U_relay_ladder2.2 R18_U_relay_ladder2.1
NetK5_U_relay_ladder2_8: K5_U_relay_ladder2.8 ULN9.14
NetK5_U_relay_ladder3_3: K5_U_relay_ladder3.3 K6_U_relay_ladder3.4 R9_U_relay_ladder3.2 R10_U_relay_ladder3.1
NetK5_U_relay_ladder3_7: K5_U_relay_ladder3.7 K6_U_relay_ladder3.6 R17_U_relay_ladder3.2 R18_U_relay_ladder3.1
NetK5_U_relay_ladder3_8: K5_U_relay_ladder3.8 ULN8.14
NetK5_U_relay_ladder4_3: K5_U_relay_ladder4.3 K6_U_relay_ladder4.4 R9_U_relay_ladder4.2 R10_U_relay_ladder4.1
NetK5_U_relay_ladder4_7: K5_U_relay_ladder4.7 K6_U_relay_ladder4.6 R17_U_relay_ladder4.2 R18_U_relay_ladder4.1
NetK5_U_relay_ladder4_8: K5_U_relay_ladder4.8 ULN7.14
NetK5_U_relay_ladder5_3: K5_U_relay_ladder5.3 K6_U_relay_ladder5.4 R9_U_relay_ladder5.2 R10_U_relay_ladder5.1
NetK5_U_relay_ladder5_7: K5_U_relay_ladder5.7 K6_U_relay_ladder5.6 R17_U_relay_ladder5.2 R18_U_relay_ladder5.1
NetK5_U_relay_ladder5_8: K5_U_relay_ladder5.8 ULN6.14
NetK5_U_relay_ladder6_3: K5_U_relay_ladder6.3 K6_U_relay_ladder6.4 R9_U_relay_ladder6.2 R10_U_relay_ladder6.1
NetK5_U_relay_ladder6_7: K5_U_relay_ladder6.7 K6_U_relay_ladder6.6 R17_U_relay_ladder6.2 R18_U_relay_ladder6.1
NetK5_U_relay_ladder6_8: K5_U_relay_ladder6.8 ULN5.14
NetK5_U_relay_ladder7_3: K5_U_relay_ladder7.3 K6_U_relay_ladder7.4 R9_U_relay_ladder7.2 R10_U_relay_ladder7.1
NetK5_U_relay_ladder7_7: K5_U_relay_ladder7.7 K6_U_relay_ladder7.6 R17_U_relay_ladder7.2 R18_U_relay_ladder7.1
NetK5_U_relay_ladder7_8: K5_U_relay_ladder7.8 ULN4.14
NetK5_U_relay_ladder8_3: K5_U_relay_ladder8.3 K6_U_relay_ladder8.4 R9_U_relay_ladder8.2 R10_U_relay_ladder8.1
NetK5_U_relay_ladder8_7: K5_U_relay_ladder8.7 K6_U_relay_ladder8.6 R17_U_relay_ladder8.2 R18_U_relay_ladder8.1
NetK5_U_relay_ladder8_8: K5_U_relay_ladder8.8 ULN3.14
NetK5_U_relay_ladder9_3: K5_U_relay_ladder9.3 K6_U_relay_ladder9.4 R9_U_relay_ladder9.2 R10_U_relay_ladder9.1
NetK5_U_relay_ladder9_7: K5_U_relay_ladder9.7 K6_U_relay_ladder9.6 R17_U_relay_ladder9.2 R18_U_relay_ladder9.1
NetK5_U_relay_ladder9_8: K5_U_relay_ladder9.8 ULN2.14
NetK5_U_relay_ladder10_3: K5_U_relay_ladder10.3 K6_U_relay_ladder10.4 R9_U_relay_ladder10.2 R10_U_relay_ladder10.1
NetK5_U_relay_ladder10_7: K5_U_relay_ladder10.7 K6_U_relay_ladder10.6 R17_U_relay_ladder10.2 R18_U_relay_ladder10.1
NetK5_U_relay_ladder10_8: K5_U_relay_ladder10.8 ULN1.14
NetK6_U_relay_ladder1_3: K6_U_relay_ladder1.3 K7_U_relay_ladder1.4 R10_U_relay_ladder1.2 R11_U_relay_ladder1.1
NetK6_U_relay_ladder1_7: K6_U_relay_ladder1.7 K7_U_relay_ladder1.6 R18_U_relay_ladder1.2 R19_U_relay_ladder1.1
NetK6_U_relay_ladder1_8: K6_U_relay_ladder1.8 ULN10.15
NetK6_U_relay_ladder2_3: K6_U_relay_ladder2.3 K7_U_relay_ladder2.4 R10_U_relay_ladder2.2 R11_U_relay_ladder2.1
NetK6_U_relay_ladder2_7: K6_U_relay_ladder2.7 K7_U_relay_ladder2.6 R18_U_relay_ladder2.2 R19_U_relay_ladder2.1
NetK6_U_relay_ladder2_8: K6_U_relay_ladder2.8 ULN9.15
NetK6_U_relay_ladder3_3: K6_U_relay_ladder3.3 K7_U_relay_ladder3.4 R10_U_relay_ladder3.2 R11_U_relay_ladder3.1
NetK6_U_relay_ladder3_7: K6_U_relay_ladder3.7 K7_U_relay_ladder3.6 R18_U_relay_ladder3.2 R19_U_relay_ladder3.1
NetK6_U_relay_ladder3_8: K6_U_relay_ladder3.8 ULN8.15
NetK6_U_relay_ladder4_3: K6_U_relay_ladder4.3 K7_U_relay_ladder4.4 R10_U_relay_ladder4.2 R11_U_relay_ladder4.1
NetK6_U_relay_ladder4_7: K6_U_relay_ladder4.7 K7_U_relay_ladder4.6 R18_U_relay_ladder4.2 R19_U_relay_ladder4.1
NetK6_U_relay_ladder4_8: K6_U_relay_ladder4.8 ULN7.15
NetK6_U_relay_ladder5_3: K6_U_relay_ladder5.3 K7_U_relay_ladder5.4 R10_U_relay_ladder5.2 R11_U_relay_ladder5.1
NetK6_U_relay_ladder5_7: K6_U_relay_ladder5.7 K7_U_relay_ladder5.6 R18_U_relay_ladder5.2 R19_U_relay_ladder5.1
NetK6_U_relay_ladder5_8: K6_U_relay_ladder5.8 ULN6.15
NetK6_U_relay_ladder6_3: K6_U_relay_ladder6.3 K7_U_relay_ladder6.4 R10_U_relay_ladder6.2 R11_U_relay_ladder6.1
NetK6_U_relay_ladder6_7: K6_U_relay_ladder6.7 K7_U_relay_ladder6.6 R18_U_relay_ladder6.2 R19_U_relay_ladder6.1
NetK6_U_relay_ladder6_8: K6_U_relay_ladder6.8 ULN5.15
NetK6_U_relay_ladder7_3: K6_U_relay_ladder7.3 K7_U_relay_ladder7.4 R10_U_relay_ladder7.2 R11_U_relay_ladder7.1
NetK6_U_relay_ladder7_7: K6_U_relay_ladder7.7 K7_U_relay_ladder7.6 R18_U_relay_ladder7.2 R19_U_relay_ladder7.1
NetK6_U_relay_ladder7_8: K6_U_relay_ladder7.8 ULN4.15
NetK6_U_relay_ladder8_3: K6_U_relay_ladder8.3 K7_U_relay_ladder8.4 R10_U_relay_ladder8.2 R11_U_relay_ladder8.1
NetK6_U_relay_ladder8_7: K6_U_relay_ladder8.7 K7_U_relay_ladder8.6 R18_U_relay_ladder8.2 R19_U_relay_ladder8.1
NetK6_U_relay_ladder8_8: K6_U_relay_ladder8.8 ULN3.15
NetK6_U_relay_ladder9_3: K6_U_relay_ladder9.3 K7_U_relay_ladder9.4 R10_U_relay_ladder9.2 R11_U_relay_ladder9.1
NetK6_U_relay_ladder9_7: K6_U_relay_ladder9.7 K7_U_relay_ladder9.6 R18_U_relay_ladder9.2 R19_U_relay_ladder9.1
NetK6_U_relay_ladder9_8: K6_U_relay_ladder9.8 ULN2.15
NetK6_U_relay_ladder10_3: K6_U_relay_ladder10.3 K7_U_relay_ladder10.4 R10_U_relay_ladder10.2 R11_U_relay_ladder10.1
NetK6_U_relay_ladder10_7: K6_U_relay_ladder10.7 K7_U_relay_ladder10.6 R18_U_relay_ladder10.2 R19_U_relay_ladder10.1
NetK6_U_relay_ladder10_8: K6_U_relay_ladder10.8 ULN1.15
NetK7_U_relay_ladder1_3: K7_U_relay_ladder1.3 K8_U_relay_ladder1.4 R11_U_relay_ladder1.2 R12_U_relay_ladder1.1
NetK7_U_relay_ladder1_7: K7_U_relay_ladder1.7 K8_U_relay_ladder1.6 R19_U_relay_ladder1.2 R20_U_relay_ladder1.1
NetK7_U_relay_ladder1_8: K7_U_relay_ladder1.8 ULN10.16
NetK7_U_relay_ladder2_3: K7_U_relay_ladder2.3 K8_U_relay_ladder2.4 R11_U_relay_ladder2.2 R12_U_relay_ladder2.1
NetK7_U_relay_ladder2_7: K7_U_relay_ladder2.7 K8_U_relay_ladder2.6 R19_U_relay_ladder2.2 R20_U_relay_ladder2.1
NetK7_U_relay_ladder2_8: K7_U_relay_ladder2.8 ULN9.16
NetK7_U_relay_ladder3_3: K7_U_relay_ladder3.3 K8_U_relay_ladder3.4 R11_U_relay_ladder3.2 R12_U_relay_ladder3.1
NetK7_U_relay_ladder3_7: K7_U_relay_ladder3.7 K8_U_relay_ladder3.6 R19_U_relay_ladder3.2 R20_U_relay_ladder3.1
NetK7_U_relay_ladder3_8: K7_U_relay_ladder3.8 ULN8.16
NetK7_U_relay_ladder4_3: K7_U_relay_ladder4.3 K8_U_relay_ladder4.4 R11_U_relay_ladder4.2 R12_U_relay_ladder4.1
NetK7_U_relay_ladder4_7: K7_U_relay_ladder4.7 K8_U_relay_ladder4.6 R19_U_relay_ladder4.2 R20_U_relay_ladder4.1
NetK7_U_relay_ladder4_8: K7_U_relay_ladder4.8 ULN7.16
NetK7_U_relay_ladder5_3: K7_U_relay_ladder5.3 K8_U_relay_ladder5.4 R11_U_relay_ladder5.2 R12_U_relay_ladder5.1
NetK7_U_relay_ladder5_7: K7_U_relay_ladder5.7 K8_U_relay_ladder5.6 R19_U_relay_ladder5.2 R20_U_relay_ladder5.1
NetK7_U_relay_ladder5_8: K7_U_relay_ladder5.8 ULN6.16
NetK7_U_relay_ladder6_3: K7_U_relay_ladder6.3 K8_U_relay_ladder6.4 R11_U_relay_ladder6.2 R12_U_relay_ladder6.1
NetK7_U_relay_ladder6_7: K7_U_relay_ladder6.7 K8_U_relay_ladder6.6 R19_U_relay_ladder6.2 R20_U_relay_ladder6.1
NetK7_U_relay_ladder6_8: K7_U_relay_ladder6.8 ULN5.16
NetK7_U_relay_ladder7_3: K7_U_relay_ladder7.3 K8_U_relay_ladder7.4 R11_U_relay_ladder7.2 R12_U_relay_ladder7.1
NetK7_U_relay_ladder7_7: K7_U_relay_ladder7.7 K8_U_relay_ladder7.6 R19_U_relay_ladder7.2 R20_U_relay_ladder7.1
NetK7_U_relay_ladder7_8: K7_U_relay_ladder7.8 ULN4.16
NetK7_U_relay_ladder8_3: K7_U_relay_ladder8.3 K8_U_relay_ladder8.4 R11_U_relay_ladder8.2 R12_U_relay_ladder8.1
NetK7_U_relay_ladder8_7: K7_U_relay_ladder8.7 K8_U_relay_ladder8.6 R19_U_relay_ladder8.2 R20_U_relay_ladder8.1
NetK7_U_relay_ladder8_8: K7_U_relay_ladder8.8 ULN3.16
NetK7_U_relay_ladder9_3: K7_U_relay_ladder9.3 K8_U_relay_ladder9.4 R11_U_relay_ladder9.2 R12_U_relay_ladder9.1
NetK7_U_relay_ladder9_7: K7_U_relay_ladder9.7 K8_U_relay_ladder9.6 R19_U_relay_ladder9.2 R20_U_relay_ladder9.1
NetK7_U_relay_ladder9_8: K7_U_relay_ladder9.8 ULN2.16
NetK7_U_relay_ladder10_3: K7_U_relay_ladder10.3 K8_U_relay_ladder10.4 R11_U_relay_ladder10.2 R12_U_relay_ladder10.1
NetK7_U_relay_ladder10_7: K7_U_relay_ladder10.7 K8_U_relay_ladder10.6 R19_U_relay_ladder10.2 R20_U_relay_ladder10.1
NetK7_U_relay_ladder10_8: K7_U_relay_ladder10.8 ULN1.16
NetK8_U_relay_ladder1_8: K8_U_relay_ladder1.8 ULN10.17
NetK8_U_relay_ladder2_8: K8_U_relay_ladder2.8 ULN9.17
NetK8_U_relay_ladder3_8: K8_U_relay_ladder3.8 ULN8.17
NetK8_U_relay_ladder4_8: K8_U_relay_ladder4.8 ULN7.17
NetK8_U_relay_ladder5_8: K8_U_relay_ladder5.8 ULN6.17
NetK8_U_relay_ladder6_8: K8_U_relay_ladder6.8 ULN5.17
NetK8_U_relay_ladder7_8: K8_U_relay_ladder7.8 ULN4.17
NetK8_U_relay_ladder8_8: K8_U_relay_ladder8.8 ULN3.17
NetK8_U_relay_ladder9_8: K8_U_relay_ladder9.8 ULN2.17
NetK8_U_relay_ladder10_8: K8_U_relay_ladder10.8 ULN1.17
NetMCP1_1: MCP1.1 ULN2.2
NetMCP1_2: MCP1.2 ULN2.1
NetMCP1_3: MCP1.3 ULN2.20
NetMCP1_4: MCP1.4 ULN2.19
NetMCP1_17: MCP1.17 ULN1.6
NetMCP1_18: MCP1.18 ULN1.5
NetMCP1_19: MCP1.19 ULN1.4
NetMCP1_20: MCP1.20 ULN1.3
NetMCP1_21: MCP1.21 ULN1.2
NetMCP1_22: MCP1.22 ULN1.1
NetMCP1_23: MCP1.23 ULN1.20
NetMCP1_24: MCP1.24 ULN1.19
NetMCP1_25: MCP1.25 ULN2.6
NetMCP1_26: MCP1.26 ULN2.5
NetMCP1_27: MCP1.27 ULN2.4
NetMCP1_28: MCP1.28 ULN2.3
NetMCP2_1: MCP2.1 ULN4.2
NetMCP2_2: MCP2.2 ULN4.1
NetMCP2_3: MCP2.3 ULN4.20
NetMCP2_4: MCP2.4 ULN4.19
NetMCP2_17: MCP2.17 ULN3.6
NetMCP2_18: MCP2.18 ULN3.5
NetMCP2_19: MCP2.19 ULN3.4
NetMCP2_20: MCP2.20 ULN3.3
NetMCP2_21: MCP2.21 ULN3.2
NetMCP2_22: MCP2.22 ULN3.1
NetMCP2_23: MCP2.23 ULN3.20
NetMCP2_24: MCP2.24 ULN3.19
NetMCP2_25: MCP2.25 ULN4.6
NetMCP2_26: MCP2.26 ULN4.5
NetMCP2_27: MCP2.27 ULN4.4
NetMCP2_28: MCP2.28 ULN4.3
NetMCP3_1: MCP3.1 ULN6.2
NetMCP3_2: MCP3.2 ULN6.1
NetMCP3_3: MCP3.3 ULN6.20
NetMCP3_4: MCP3.4 ULN6.19
NetMCP3_17: MCP3.17 ULN5.6
NetMCP3_18: MCP3.18 ULN5.5
NetMCP3_19: MCP3.19 ULN5.4
NetMCP3_20: MCP3.20 ULN5.3
NetMCP3_21: MCP3.21 ULN5.2
NetMCP3_22: MCP3.22 ULN5.1
NetMCP3_23: MCP3.23 ULN5.20
NetMCP3_24: MCP3.24 ULN5.19
NetMCP3_25: MCP3.25 ULN6.6
NetMCP3_26: MCP3.26 ULN6.5
NetMCP3_27: MCP3.27 ULN6.4
NetMCP3_28: MCP3.28 ULN6.3
NetMCP4_1: MCP4.1 ULN8.2
NetMCP4_2: MCP4.2 ULN8.1
NetMCP4_3: MCP4.3 ULN8.20
NetMCP4_4: MCP4.4 ULN8.19
NetMCP4_17: MCP4.17 ULN7.6
NetMCP4_18: MCP4.18 ULN7.5
NetMCP4_19: MCP4.19 ULN7.4
NetMCP4_20: MCP4.20 ULN7.3
NetMCP4_21: MCP4.21 ULN7.2
NetMCP4_22: MCP4.22 ULN7.1
NetMCP4_23: MCP4.23 ULN7.20
NetMCP4_24: MCP4.24 ULN7.19
NetMCP4_25: MCP4.25 ULN8.6
NetMCP4_26: MCP4.26 ULN8.5
NetMCP4_27: MCP4.27 ULN8.4
NetMCP4_28: MCP4.28 ULN8.3
NetMCP5_1: MCP5.1 ULN10.2
NetMCP5_2: MCP5.2 ULN10.1
NetMCP5_3: MCP5.3 ULN10.20
NetMCP5_4: MCP5.4 ULN10.19
NetMCP5_17: MCP5.17 ULN9.6
NetMCP5_18: MCP5.18 ULN9.5
NetMCP5_19: MCP5.19 ULN9.4
NetMCP5_20: MCP5.20 ULN9.3
NetMCP5_21: MCP5.21 ULN9.2
NetMCP5_22: MCP5.22 ULN9.1
NetMCP5_23: MCP5.23 ULN9.20
NetMCP5_24: MCP5.24 ULN9.19
NetMCP5_25: MCP5.25 ULN10.6
NetMCP5_26: MCP5.26 ULN10.5
NetMCP5_27: MCP5.27 ULN10.4
NetMCP5_28: MCP5.28 ULN10.3
R\E\S\E\T\: B1.5 P1.9 P2.9 R4.2
RGND: C14.2 C15.2 C16.2 C17.2 C18.2 C19.2 C26.2 C27.2 C28.2 C29.2 ULN1.8 ULN1.21 ULN2.8 ULN2.21 ULN3.8 ULN3.21 ULN4.8 ULN4.21 ULN5.8 ULN5.21 ULN6.8 ULN6.21 ULN7.8 ULN7.21 ULN8.8 ULN8.21 ULN9.8 ULN9.21 ULN10.8 ULN10.21
  other v1: 262.052,3.766 263.152,3.766 267.68,3.766 268.78,3.766 273.308,3.766 274.408,3.766 278.936,3.766 280.036,3.766 284.564,3.766 285.664,3.766 290.193,3.766 291.293,3.766 295.821,3.766 296.921,3.766 301.449,3.766 302.549,3.766 307.077,3.766 308.177,3.766 262.052,4.866 263.152,4.866 267.68,4.866 268.78,4.866 273.308,4.866 274.408,4.866 278.936,4.866 280.036,4.866 284.564,4.866 285.664,4.866 290.193,4.866 291.293,4.866 295.821,4.866 296.921,4.866 301.449,4.866 302.549,4.866 307.077,4.866 308.177,4.866 304.526,29.569 305.626,29.569 304.526,30.669 305.626,30.669
RS485_DE: B1.19 B2.3 B2.4
RS485_RX: B1.27 B2.2
RS485_TX: B1.26 B2.5
S\S\: B1.22 P1.4 P2.4
SCK: B1.23 P1.3 P2.3
SCL_DRV: B1.1 MCP1.8 MCP2.8 MCP3.8 MCP4.8 MCP5.8 R1.2
SDA_DRV: B1.28 MCP1.9 MCP2.9 MCP3.9 MCP4.9 MCP5.9 R2.2
SWCLK: B1.21 P1.12 P2.12
SWDIO: B1.20 P1.11 P2.11
"VCC 5V": B2.10 C2.1 C8.1 C9.1 C21.1 LD1.1 LD1.3 P4.3 P5.3
pads on no net: B1.2 B1.8 B1.9 B1.10 B1.11 B1.12 B1.13 B1.14 B1.15 B1.16 B1.17 B1.18 B2.7 K1_U_relay_ladder1.2 K1_U_relay_ladder1.5 K1_U_relay_ladder2.2 K1_U_relay_ladder2.5 K1_U_relay_ladder3.2 K1_U_relay_ladder3.5 K1_U_relay_ladder4.2 K1_U_relay_ladder4.5 K1_U_relay_ladder5.2 K1_U_relay_ladder5.5 K1_U_relay_ladder6.2 K1_U_relay_ladder6.5 K1_U_relay_ladder7.2 K1_U_relay_ladder7.5 K1_U_relay_ladder8.2 K1_U_relay_ladder8.5 K1_U_relay_ladder9.2 K1_U_relay_ladder9.5 K1_U_relay_ladder10.2 K1_U_relay_ladder10.5 K2_U_relay_ladder1.2 K2_U_relay_ladder1.5 K2_U_relay_ladder2.2 K2_U_relay_ladder2.5 K2_U_relay_ladder3.2 K2_U_relay_ladder3.5 K2_U_relay_ladder4.2 K2_U_relay_ladder4.5 K2_U_relay_ladder5.2 K2_U_relay_ladder5.5 K2_U_relay_ladder6.2 K2_U_relay_ladder6.5 K2_U_relay_ladder7.2 K2_U_relay_ladder7.5 K2_U_relay_ladder8.2 K2_U_relay_ladder8.5 K2_U_relay_ladder9.2 K2_U_relay_ladder9.5 K2_U_relay_ladder10.2 K2_U_relay_ladder10.5 K3_U_relay_ladder1.2 K3_U_relay_ladder1.5 K3_U_relay_ladder2.2 K3_U_relay_ladder2.5 K3_U_relay_ladder3.2 K3_U_relay_ladder3.5 K3_U_relay_ladder4.2 K3_U_relay_ladder4.5 K3_U_relay_ladder5.2 K3_U_relay_ladder5.5 K3_U_relay_ladder6.2 K3_U_relay_ladder6.5 K3_U_relay_ladder7.2 K3_U_relay_ladder7.5 K3_U_relay_ladder8.2 K3_U_relay_ladder8.5 K3_U_relay_ladder9.2 K3_U_relay_ladder9.5 K3_U_relay_ladder10.2 K3_U_relay_ladder10.5 K4_U_relay_ladder1.2 K4_U_relay_ladder1.5 K4_U_relay_ladder2.2 K4_U_relay_ladder2.5 K4_U_relay_ladder3.2 K4_U_relay_ladder3.5 K4_U_relay_ladder4.2 K4_U_relay_ladder4.5 K4_U_relay_ladder5.2 K4_U_relay_ladder5.5 K4_U_relay_ladder6.2 K4_U_relay_ladder6.5 K4_U_relay_ladder7.2 K4_U_relay_ladder7.5 K4_U_relay_ladder8.2 K4_U_relay_ladder8.5 K4_U_relay_ladder9.2 K4_U_relay_ladder9.5 K4_U_relay_ladder10.2 K4_U_relay_ladder10.5 K5_U_relay_ladder1.2 K5_U_relay_ladder1.5 K5_U_relay_ladder2.2 K5_U_relay_ladder2.5 K5_U_relay_ladder3.2 K5_U_relay_ladder3.5 K5_U_relay_ladder4.2 K5_U_relay_ladder4.5 K5_U_relay_ladder5.2 K5_U_relay_ladder5.5 K5_U_relay_ladder6.2 K5_U_relay_ladder6.5 K5_U_relay_ladder7.2 K5_U_relay_ladder7.5 K5_U_relay_ladder8.2 K5_U_relay_ladder8.5 K5_U_relay_ladder9.2 K5_U_relay_ladder9.5 K5_U_relay_ladder10.2 K5_U_relay_ladder10.5 K6_U_relay_ladder1.2 K6_U_relay_ladder1.5 K6_U_relay_ladder2.2 K6_U_relay_ladder2.5 K6_U_relay_ladder3.2 K6_U_relay_ladder3.5 K6_U_relay_ladder4.2 K6_U_relay_ladder4.5 K6_U_relay_ladder5.2 K6_U_relay_ladder5.5 K6_U_relay_ladder6.2 K6_U_relay_ladder6.5 K6_U_relay_ladder7.2 K6_U_relay_ladder7.5 K6_U_relay_ladder8.2 K6_U_relay_ladder8.5 K6_U_relay_ladder9.2 K6_U_relay_ladder9.5 K6_U_relay_ladder10.2 K6_U_relay_ladder10.5 K7_U_relay_ladder1.2 K7_U_relay_ladder1.5 K7_U_relay_ladder2.2 K7_U_relay_ladder2.5 K7_U_relay_ladder3.2 K7_U_relay_ladder3.5 K7_U_relay_ladder4.2 K7_U_relay_ladder4.5 K7_U_relay_ladder5.2 K7_U_relay_ladder5.5 K7_U_relay_ladder6.2 K7_U_relay_ladder6.5 K7_U_relay_ladder7.2 K7_U_relay_ladder7.5 K7_U_relay_ladder8.2 K7_U_relay_ladder8.5 K7_U_relay_ladder9.2 K7_U_relay_ladder9.5 K7_U_relay_ladder10.2 K7_U_relay_ladder10.5 K8_U_relay_ladder1.2 K8_U_relay_ladder1.5 K8_U_relay_ladder2.2 K8_U_relay_ladder2.5 K8_U_relay_ladder3.2 K8_U_relay_ladder3.5 K8_U_relay_ladder4.2 K8_U_relay_ladder4.5 K8_U_relay_ladder5.2 K8_U_relay_ladder5.5 K8_U_relay_ladder6.2 K8_U_relay_ladder6.5 K8_U_relay_ladder7.2 K8_U_relay_ladder7.5 K8_U_relay_ladder8.2 K8_U_relay_ladder8.5 K8_U_relay_ladder9.2 K8_U_relay_ladder9.5 K8_U_relay_ladder10.2 K8_U_relay_ladder10.5 LD1.4 MCP1.7 MCP1.10 MCP1.15 MCP1.16 MCP1.29 MCP2.7 MCP2.10 MCP2.15 MCP2.16 MCP2.29 MCP3.7 MCP3.10 MCP3.15 MCP3.16 MCP3.29 MCP4.7 MCP4.10 MCP4.15 MCP4.16 MCP4.29 MCP5.7 MCP5.10 MCP5.15 MCP5.16 MCP5.29 ULN1.7 ULN1.18 ULN2.7 ULN2.18 ULN3.7 ULN3.18 ULN4.7 ULN4.18 ULN5.7 ULN5.18 ULN6.7 ULN6.18 ULN7.7 ULN7.18 ULN8.7 ULN8.18 ULN9.7 ULN9.18 ULN10.7 ULN10.18
copper on no net:
  other v1: 267.935,28.044 269.035,28.044 270.135,28.044 275.488,28.044 276.588,28.044 277.688,28.044 283.041,28.044 284.141,28.044 285.241,28.044 290.594,28.044 291.694,28.044 292.794,28.044 298.148,28.044 299.248,28.044 300.348,28.044 267.935,29.144 269.035,29.144 270.135,29.144 275.488,29.144 276.588,29.144 277.688,29.144 283.041,29.144 284.141,29.144 285.241,29.144 290.594,29.144 291.694,29.144 292.794,29.144 298.148,29.144 299.248,29.144 300.348,29.144 267.935,30.244 269.035,30.244 270.135,30.244 275.488,30.244 276.588,30.244 277.688,30.244 283.041,30.244 284.141,30.244 285.241,30.244 290.594,30.244 291.694,30.244 292.794,30.244 298.148,30.244 299.248,30.244 300.348,30.244

## Text inside footprints (layer, text, board x,y; h text height)
C20: Top Overlay "+" at 271.388,60.444 h1.5
C21: Top Overlay "+" at 276.791,60.444 h1.5
P3: Top Overlay "20" at 261.38,32.598 h1.27 r90; Top Overlay "19" at 263.92,32.598 h1.27 r90; Top Overlay "1" at 263.92,5.674 h1.27 r90; Top Overlay "2" at 261.38,5.674 h1.27 r90